# Altium PCB OSSI-1 LED Panel.PcbDoc
Units mil, origin at the board's own origin, x right, y up, seen from the top; angles counter-clockwise.
Board outline 1378 x 2363 mil, 2 copper layers (Top, Bottom), stack 61.811 mil thick; 6 components, 3 nets, 16 pads, 0 vias.
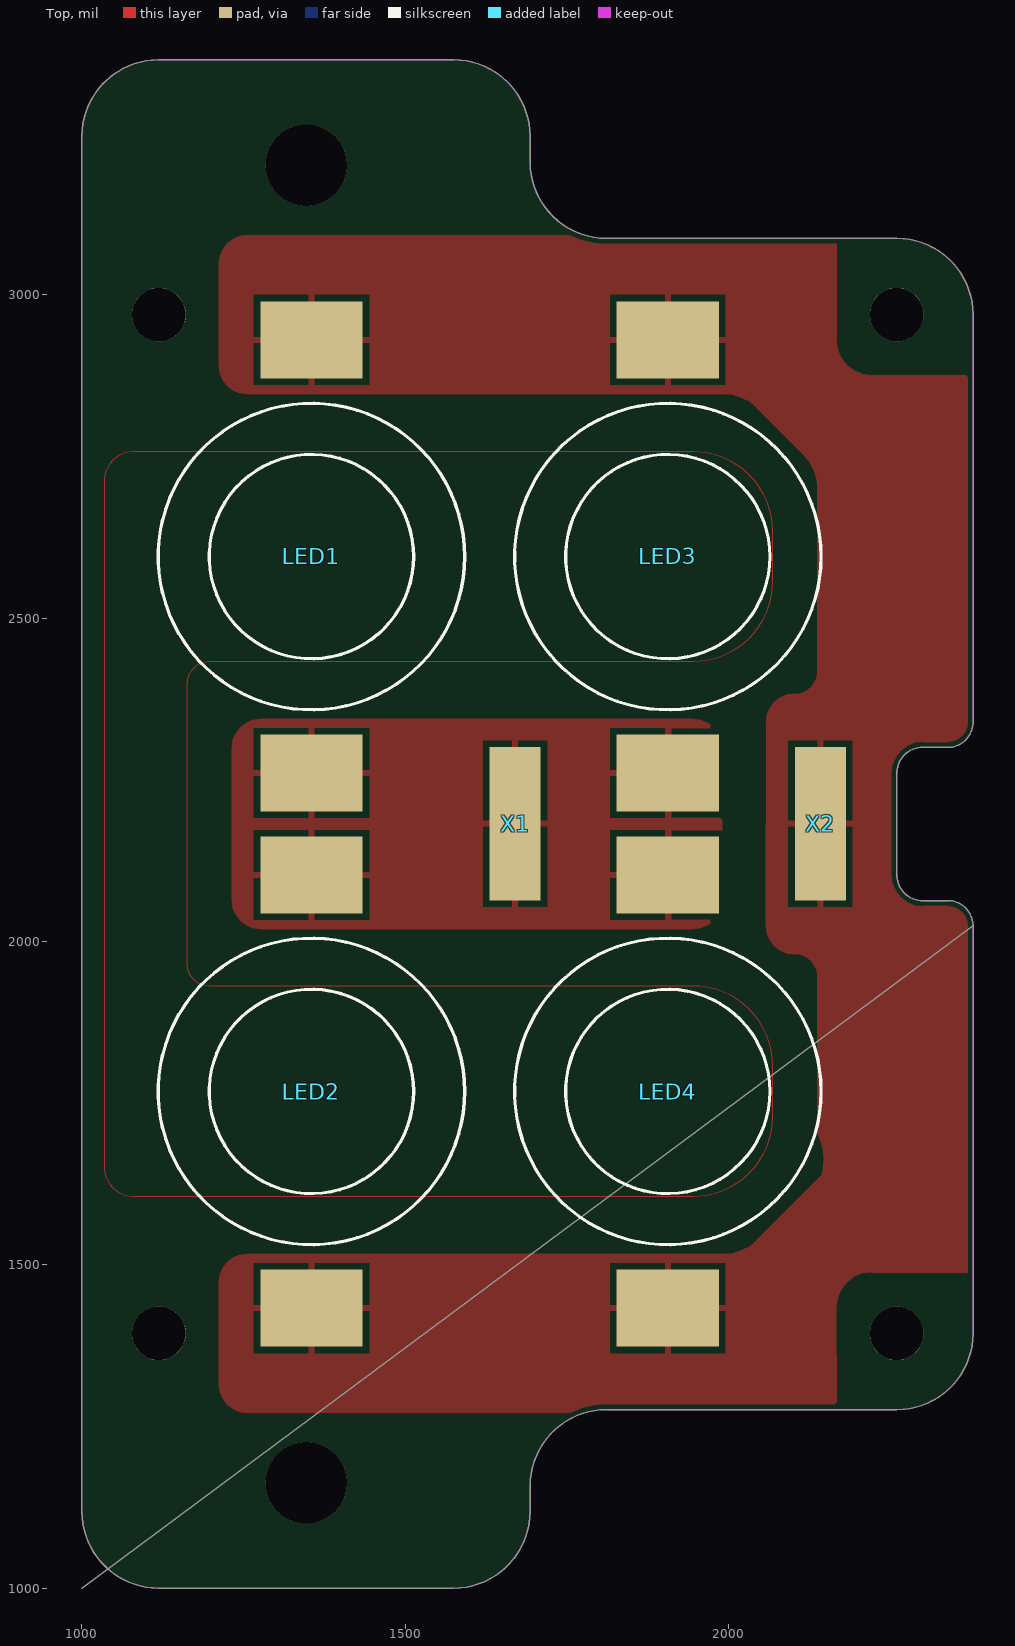
[diagram p0: Top view]
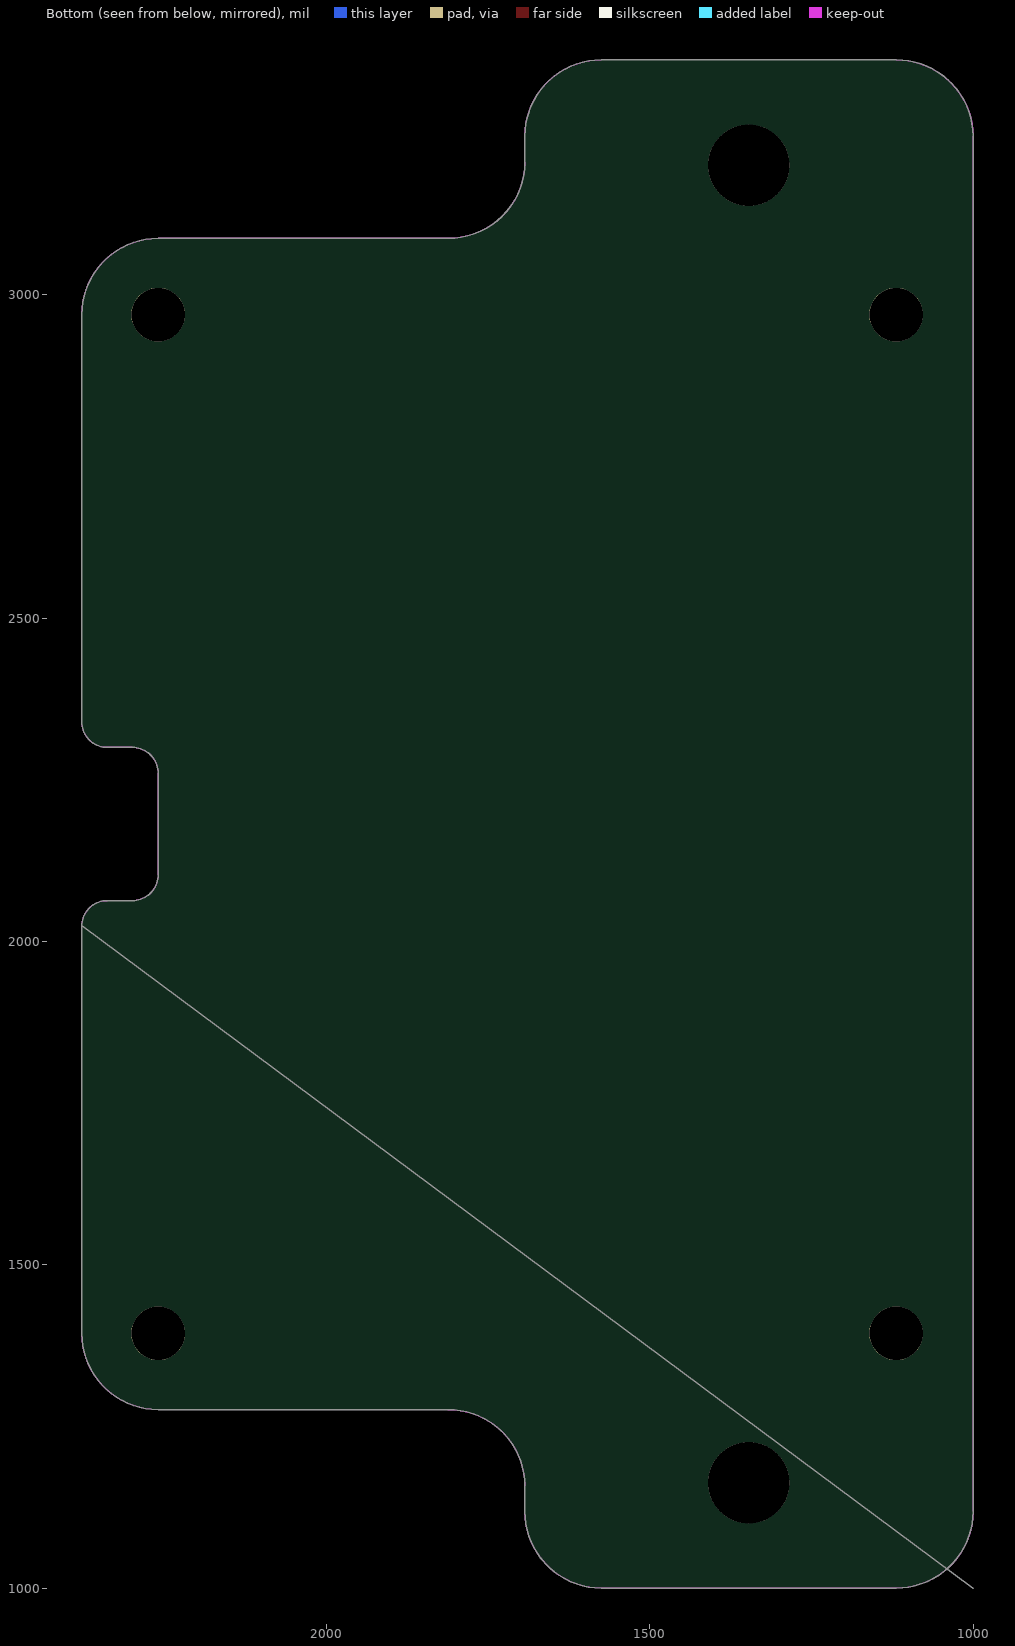
[diagram p1: Bottom view, seen from below]

## Layer stack, top to bottom
Top Solder: solder mask 0.4, Solder Resist, Dk 3.5
Top: signal copper 1.378
Dielectric 1: core 59.0551, FR-4, Dk 4.8
Bottom: signal copper 1.378
Bottom Solder: solder mask 0.4, Solder Resist, Dk 3.5

## Board outline
2378,2024 2378,1394 cw(c2260,1394) 2260,1276 1812,1276 ccw(c1811.5,1157.5) 1693,1158 1693,1119 cw(c1574.5,1118.5) 1575,1000 1119,1000 cw(c1119,1119) 1000,1119 1000,3245 cw(c1118.5,3244.5) 1119,3363 1575,3363 cw(c1575,3245) 1693,3245 1693,3205 ccw(c1811.5,3205.5) 1812,3087 2260,3087 cw(c2260,2969) 2378,2969 2378,2339 cw(c2339,2339) 2339,2300 2300,2300 ccw(c2300,2260) 2260,2260 2260,2103 ccw(c2300,2103) 2300,2063 2339,2063 cw(c2339,2024) 1000,1000

## Design rules (kind name [scope] priority, off if disabled: settings)
Clearance mdViaVia [IsVia vs IsVia] p1: gap=8
Clearance mdPadVia [IsPad vs IsVia] p2: gap=8
Clearance mdPadPad [IsPad vs IsPad] p3: gap=8
Clearance mdWireVia [(InLayerClass('Signal Layers') AND IsTrack) vs IsVia] p4: gap=8
Clearance mdWirePad [(InLayerClass('Signal Layers') AND IsTrack) vs IsPad] p5: gap=8
Clearance mdWireWire [(InLayerClass('Signal Layers') AND IsTrack) vs (InLayerClass('Signal Layers') AND IsTrack)] p6: gap=8
Clearance [All] p7: gap=8
HoleSize [All] p1: absolutevalues=TRUE maxlimit=100000 minlimit=24 maxpercent=80.000 minpercent=20.000
HoleToHoleClearance [All] p1: gap=8 allowstackedmicrovias=TRUE
PolygonConnect ThermalVias [IsVia] p1: connectstyle=Direct reliefconductorwidth=10 reliefentries=4 polygonreliefangle="90 Angle" airgapwidth=10
PolygonConnect [All] p2: connectstyle=Relief reliefconductorwidth=10 reliefentries=4 polygonreliefangle="90 Angle" airgapwidth=10
RoutingVias [All] p1: holewidth=28 width=50 viastyle="Through Hole" minholewidth=28 minwidth=50 maxholewidth=28 maxwidth=50
SilkToSilkClearance [All] p1 off: silktosilkclearance=10
SilkToSolderMaskClearance [IsPad] p1 off: minsilkscreentomaskgap=10 clearancetoexposedcopper=TRUE
SolderMaskExpansion [All] p1: expansion=4
Width [All] p1: maxlimit=100000 minlimit=10 preferedwidth=10
26 further rules are at their usual default settings.

## Components (designator, comment, footprint, x,y, rotation, side; value= is the part's Value field where it differs from the comment)
LED1 "LED-P7" P7 1355,2595 r90 top
LED2 "LED-P7" P7 1355,1768 r270 top
LED3 "LED-P7" P7 1906,2595 r90 top
LED4 "LED-P7" P7 1906,1768 r270 top
X1 "P-PAD" P-PAD 1670,2182 r90 top
X2 "P-PAD" P-PAD 2142,2182 r90 top

## Footprints (in the part's own frame and the unit in brackets; to place one, negate y for a bottom-side part, rotate by r counter-clockwise, add the part's x,y. Pads: shape width x height; smd on the part's side, far side on the other; paste and mask are expansions set on the pad)
P7 [mil] "P7"
  rect 119x158 smd: A(-334.65,0) C(335,0)
  silkscreen extent -237,-237 237,237
P-PAD [mil] "P-PAD"
  rect 237x79 smd: 1(0,0)

## Part data
LED1 LED2 LED3 LED4: library part P7

## Free pads (board coordinates)
  round 83 hole 83: 1(1119,1394) 1(1119,2969) 1(2260,1394) 1(2260,2969)
  round 126 hole 126: 1(1347,1163) 1(1347,3200)

## Nets (pads, with @x,y where several pads share a name; then routed paths per layer and width w, separated by ;. In a path a pad name is that pad's centre, name@x,y a point inside that pad or via, vN(x,y) a via of type N, cw(c..) or ccw(c..) an arc to the next point about the centre after c; other vN are vias at no path point)
LED+: LED1.A LED2.A LED3.A LED4.A X1.1
LED-: LED1.C LED2.C LED3.C LED4.C X2.1
N$3: 

## Polygon pours and split planes (outlines as drawn)
LED+ on Top "Top-LED+" (solid, remove dead copper, pour order 2): 1944.97,2344 1275.99,2344 ccw(c1275.99,2300.01) 1232,2300.01 1232,2062.99 ccw(c1275.99,2062.99) 1275.99,2019 1944.97,2019 ccw(c1945.51,2063.49) 1990,2062.97 1990,2300.03 ccw(c1945.51,2299.51)
LED- on Top "Top-LED-" (solid, remove dead copper, pour order 4): 1212,1473.01 1212,1314.99 ccw(c1255.99,1314.99) 1255.99,1271 2167,1271 2167,1434 cw(c2221,1434) 2221,1488 2383,1488 2383,2068 2300,2068 cw(c2300,2103) 2265,2103 2265,2260 cw(c2300,2260) 2300,2295 2383,2295 2383,2876 2221,2876 cw(c2221,2930) 2167,2930 2167,3092 1255.99,3092 ccw(c1255.99,3048.01) 1212,3048.01 1212,2889.99 ccw(c1255.99,2889.99) 1255.99,2846 1991.98,2846 cw(c1991.74,2773.11) 2043.45,2824.48 2115.47,2752.46 cw(c2062.9,2700.24) 2137,2699.99 2137,2417.97 cw(c2102.5,2417.5) 2103,2383 ccw(c2102.49,2338.51) 2058,2339.03 2058,2023.97 ccw(c2102.49,2024.49) 2103,1980 cw(c2102.5,1945.5) 2137,1945.03 2137,1702.54 cw(c2062.9,1662.76) 2143.42,1638.49 2043.47,1538.54 cw(c1991.74,1589.89) 1992.01,1517 1255.99,1517 ccw(c1255.99,1473.01)
N$3 on Top "Top-N$3" (solid, remove dead copper, pour order 6): 1078.99,1606 1945.02,1606 ccw(c1945.02,1728.98) 2068,1728.98 2068,1808.02 ccw(c1945.02,1808.02) 1945.02,1931 1197,1931 cw(c1197,1965) 1163,1965 1163,2398.03 cw(c1197.5,2398.5) 1197.03,2433 1945.02,2433 ccw(c1945.02,2555.98) 2068,2555.98 2068,2634.02 ccw(c1945.02,2634.02) 1945.02,2757 1078.99,2757 ccw(c1078.99,2713.01) 1035,2713.01 1035,1649.99 ccw(c1078.99,1649.99)

## Keep-outs
Keep-Out Layer:
  lines w0: 1000,1119 ccw(c1119,1119) 1119,1000 1575,1000 ccw(c1574.5,1118.5) 1693,1119 1693,1158 cw(c1811.5,1157.5) 1812,1276 2260,1276 ccw(c2260,1394) 2378,1394 2378,2024 ccw(c2339,2024) 2339,2063 2300,2063 cw(c2300,2103) 2260,2103 2260,2260 cw(c2300,2260) 2300,2300 2339,2300 ccw(c2339,2339) 2378,2339 2378,2969 ccw(c2260,2969) 2260,3087 1812,3087 cw(c1811.5,3205.5) 1693,3205 1693,3245 ccw(c1575,3245) 1575,3363 1119,3363 ccw(c1118.5,3244.5) 1000,3245 1000,1119

## Silkscreen, mask and mechanical layers (free items; w line width, h text height)
Dimension:
  lines w0: 1000,1119 ccw(c1119,1119) 1119,1000 1575,1000 ccw(c1574.5,1118.5) 1693,1119 1693,1158 cw(c1811.5,1157.5) 1812,1276 2260,1276 ccw(c2260,1394) 2378,1394 2378,2024 ccw(c2339,2024) 2339,2063 2300,2063 cw(c2300,2103) 2260,2103 2260,2260 cw(c2300,2260) 2300,2300 2339,2300 ccw(c2339,2339) 2378,2339 2378,2969 ccw(c2260,2969) 2260,3087 1812,3087 cw(c1811.5,3205.5) 1693,3205 1693,3245 ccw(c1575,3245) 1575,3363 1119,3363 ccw(c1118.5,3244.5) 1000,3245 1000,1119

## Text inside footprints (layer, text, board x,y; h text height)
LED1: tNames ">NAME" at 1705,2395 h77.5 r90; tValues ">VALUE" at 1755,2395 h77.5 r90
LED2: tNames ">NAME" at 1005,1968 h77.5 r270; tValues ">VALUE" at 955,1968 h77.5 r270
LED3: tNames ">NAME" at 2256,2395 h77.5 r90; tValues ">VALUE" at 2306,2395 h77.5 r90
LED4: tNames ">NAME" at 1556,1968 h77.5 r270; tValues ">VALUE" at 1506,1968 h77.5 r270
X1: tNames ">NAME" at 1620,2032 h77.5 r90; tValues ">VALUE" at 1770,2032 h77.5 r90
X2: tNames ">NAME" at 2092,2032 h77.5 r90; tValues ">VALUE" at 2242,2032 h77.5 r90